# Altium PCB PCB_my-ic_2025-09-05.pcbdoc
Units mm, origin at the board's own origin, x right, y up, seen from the top; angles counter-clockwise.
Board outline 82.87 x 43.85 mm, 2 copper layers (Top Layer, Bottom Layer); 40 components, 28 nets, 131 pads, 60 vias.
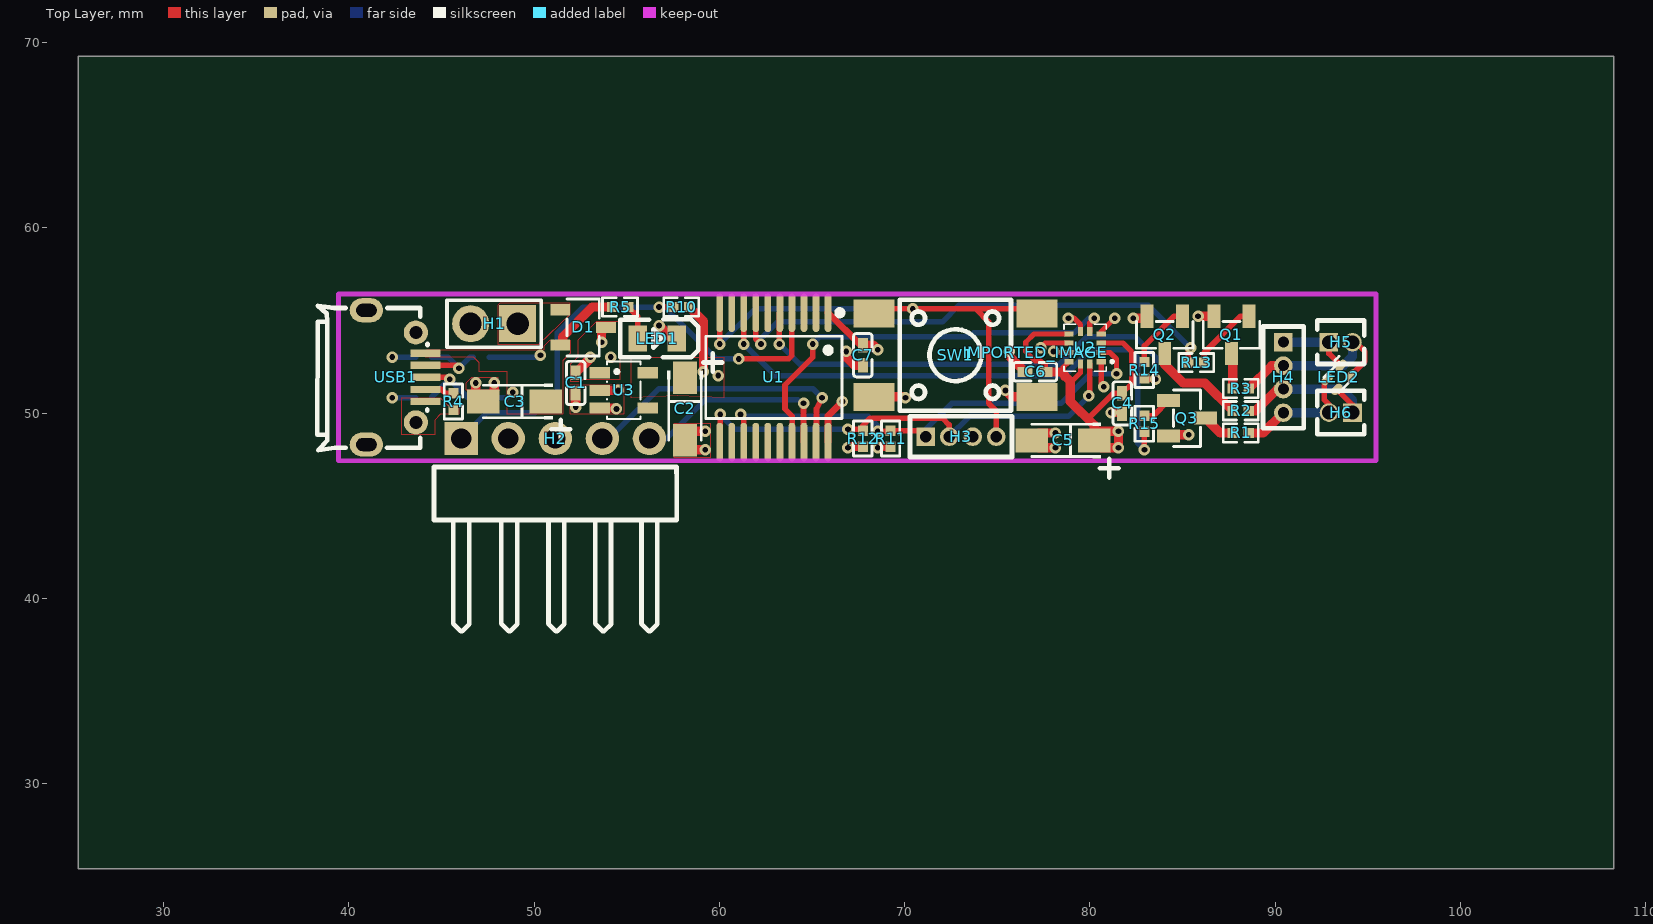
[diagram p0: Top Layer view]
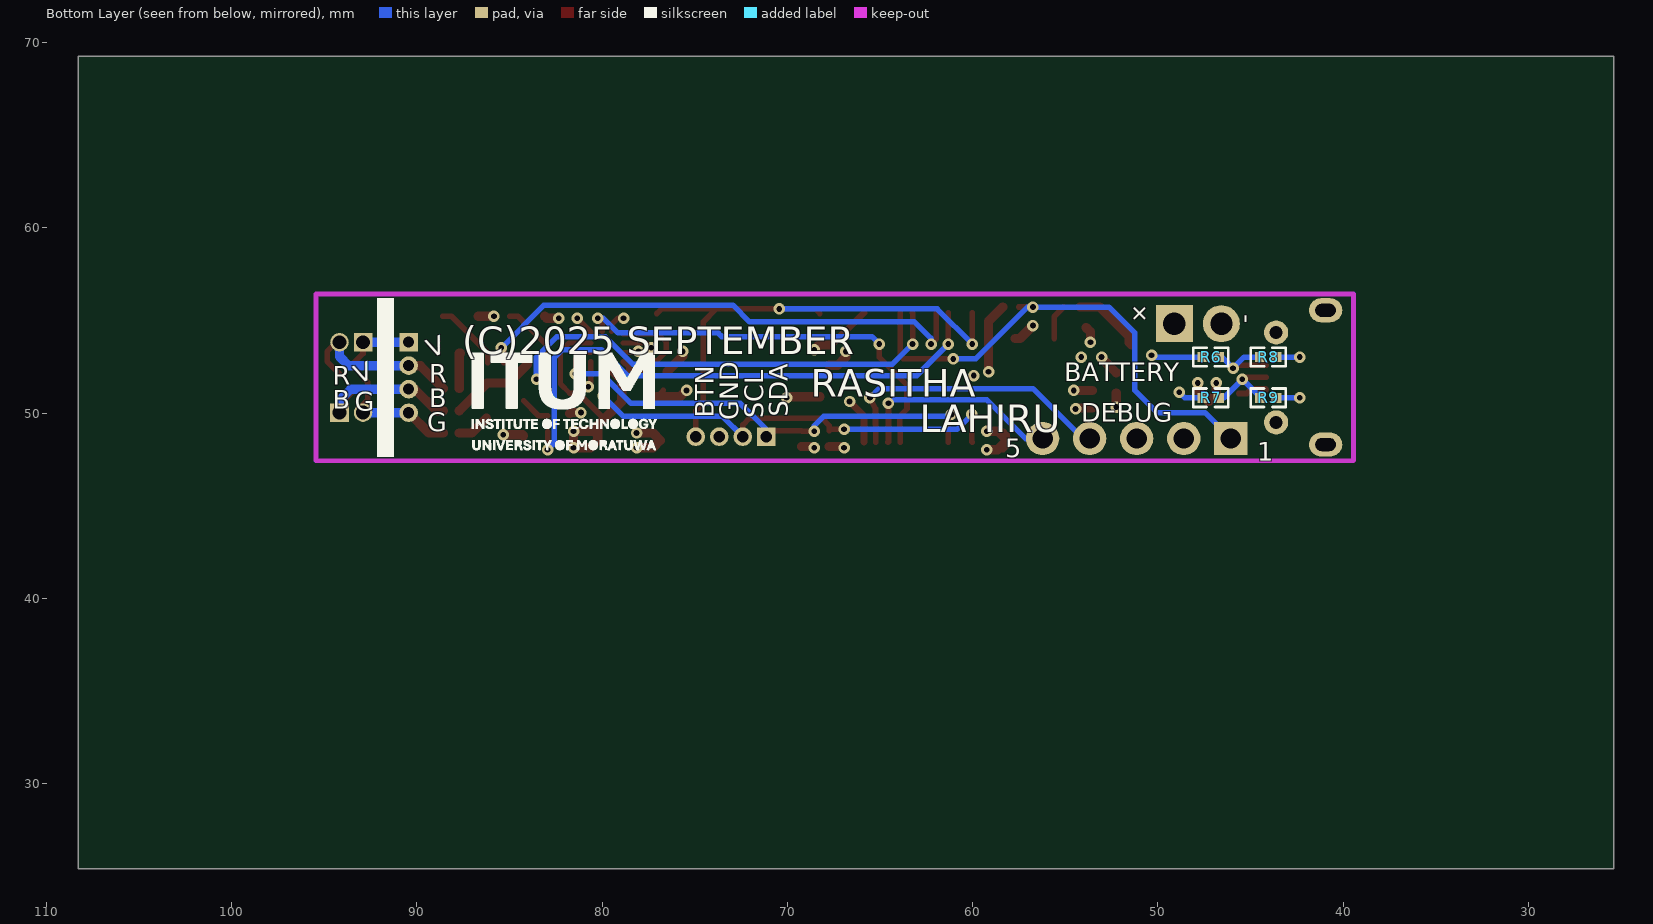
[diagram p1: Bottom Layer view, seen from below]

## Layer stack, top to bottom
Top Layer: signal copper (thickness not stored)
Dielectric: dielectric 0.32, FR-4, Dk 4.8
Bottom Layer: signal copper (thickness not stored)

## Board outline
108.268,25.4 25.4,25.4 25.4,69.254 108.268,69.254

## Components (designator, comment, footprint, x,y, rotation, side; value= is the part's Value field where it differs from the comment)
C1 "1uF" C0402 52.241,51.627 r90 top
C2 "10uF" CAP-SMD_L3.2-W1.6-RD-C7171 58.141,50.227 r270 top
C3 "10uF" CAP-SMD_L3.2-W1.6-RD-C7171 48.941,50.627 r180 top
C4 "100nF" C0402 81.741,50.527 r90 top
C5 "10uF" CAP-SMD_L3.2-W1.6-RD-C7171 78.541,48.527 r180 top
C6 "100nF" C0402 77.041,52.227 r0 top
C7 "100nF" C0402 67.741,53.127 r90 top
D1 "BAT54CLT1G" SOT-23-3_L2.9-W1.6-P1.90-LS2.8-BR 52.641,54.627 r180 top
H1 "TSW-102-07-G-S" HDR-TH_2P-P2.54-V-M 47.841,54.827 r180 top
H2 "PZ254R-11-05P" HDR-TH_5P-P2.54-H-M-W10.4 51.141,48.627 r0 top
H3 "PM127V-11-04P-H34" HDR-TH_4P-P1.27-V-F 73.041,48.727 r0 top
H4 "PM127V-11-04P-H34" HDR-TH_4P-P1.27-V-F 90.441,51.927 r270 top
H5 "1.27MM/1*2P" HDR-TH_2P-P1.27-V-M 93.541,53.827 r0 top
H6 "1.27MM/1*2P" HDR-TH_2P-P1.27-V-M 93.541,50.027 r180 top
IMPORTED_IMAGE "IMPORTED_IMAGE" IMPORTED_IMAGE 77.041,53.255 r0 top
LED1 "0805G (Green)" LED0805-R-RD 56.641,54.027 r180 top
LED2 "SMLP34RGB2W3A" LED-ARRAY-SMD_4P-L1.00-W1.00-TL 93.441,51.927 r45 top
Q1 "2N7002" SOT-23-3_L2.9-W1.3-P1.90-LS2.4-BR 87.641,54.227 r90 top
Q2 "2N7002" SOT-23-3_L2.9-W1.3-P1.90-LS2.4-BR 84.041,54.227 r90 top
Q3 "2N7002" SOT-23-3_L2.9-W1.3-P1.90-LS2.4-BR 85.241,49.727 r180 top
R1 "560Ω" R0402#1 88.141,48.927 r0 top
R2 "560Ω" R0402#1 88.141,50.127 r0 top
R3 "560Ω" R0402#1 88.141,51.327 r0 top
R4 "0Ω" R0402#1 45.641,50.627 r270 top
R5 "10kΩ" R0402#1 54.641,55.727 r180 top
R6 "5.1kΩ" R0402#2 47.141,53.027 r180 bottom
R7 "5.1kΩ" R0402#2 47.141,50.827 r180 bottom
R8 "10kΩ" R0402#2 44.041,53.027 r180 bottom
R9 "10kΩ" R0402#2 44.041,50.827 r180 bottom
R10 "10kΩ" R0402#1 57.941,55.727 r0 top
R11 "10kΩ" R0402#1 69.241,48.627 r270 top
R12 "10kΩ" R0402#1 67.741,48.627 r270 top
R13 "0Ω" R0402#1 85.741,52.727 r0 top
R14 "0Ω" R0402#1 82.941,52.327 r90 top
R15 "0Ω" R0402#1 82.941,49.427 r90 top
SW1 "K2-1102SP-C3SC-04" SW-SMD_4P-L6.0-W6.0-P4.50-LS9.0 72.741,53.127 r0 top
U1 "PIC16F1829-I/SS" SSOP-20_L7.2-W5.3-P0.65-LS7.8-BL 62.941,51.927 r180 top
U2 "KXTJ3-1057" LGA-12_L2.0-W2.0-P0.50-BL 79.741,53.527 r90 top
U3 "TPS76933DBVR(PB-FREE)" SOT-23-5_L3.0-W1.7-P0.95-LS2.8-BR 54.841,51.227 r180 top
USB1 "MICROXNJ" MICRO-USB-SMD_MICROXNJ 42.541,51.927 r270 top

## Footprints (in the part's own frame and the unit in brackets; to place one, negate y for a bottom-side part, rotate by r counter-clockwise, add the part's x,y. Pads: shape width x height; smd on the part's side, far side on the other; paste and mask are expansions set on the pad)
C0402 [mm]
  rect 0.79x0.54 smd paste-100 mask+0.051: 1(-0.545,0) 2(0.545,0)
  silkscreen extent -1.17,-0.5 1.17,0.5
CAP-SMD_L3.2-W1.6-RD-C7171 [mm]
  rect 1.758x1.296 smd paste+0 mask+0.051: 1(-1.686,0) 2(1.686,0)
  silkscreen extent -3,-0.95 1.68,2
HDR-TH_2P-P1.27-V-M [mm]
  rect 1x1 hole 0.75 paste+0 mask+0.051: 1(-0.635,0)
  round 1 hole 0.75 paste+0 mask+0.051: 2(0.635,0)
  silkscreen extent -1.27,-1.18 1.27,1.18
HDR-TH_2P-P2.54-V-M [mm]
  rect 2x2 hole 1.2 paste+0 mask+0.051: 1(-1.27,0)
  round 2 hole 1.2 paste+0 mask+0.051: 2(1.27,0)
  silkscreen extent -2.54,-1.27 2.54,1.27
HDR-TH_4P-P1.27-V-F [mm]
  rect 1x1 hole 0.6 paste+0 mask+0.051: 1(-1.905,0)
  round 1 hole 0.6 paste+0 mask+0.051: 2(-0.635,0) 3(0.635,0) 4(1.905,0)
  silkscreen extent -2.75,-1.1 2.75,1.1
HDR-TH_5P-P2.54-H-M-W10.4 [mm]
  rect 1.8x1.8 hole 1.1 paste+0 mask+0.051: 1(-5.08,0)
  round 1.8 hole 1.1 paste+0 mask+0.051: 2(-2.54,0) 3(0,0) 4(2.54,0) 5(5.08,0)
  silkscreen extent -6.55,-10.4 6.55,-1.54
IMPORTED_IMAGE [mm]
LED0805-R-RD [mm]
  rect 1x1.4 smd paste+0 mask+0.051: 1(1.05,0) 2(-1.05,0)
  silkscreen extent -2.22,-1.04 1.99,1.01
LED-ARRAY-SMD_4P-L1.00-W1.00-TL [mm]
  oval 0.715x0.42 smd paste+0 mask+0.051: 1(0.533,0.375) 2(0.533,-0.375) 3(-0.532,-0.375) 4(-0.532,0.375)
  silkscreen extent -0.58,-0.58 0.8,0.8
LGA-12_L2.0-W2.0-P0.50-BL [mm]
  rect 0.28x0.5 smd paste+0 mask+0.051: 1(-0.75,-0.875) 2(-0.25,-0.875) 3(0.25,-0.875) 4(0.75,-0.875) 7(0.75,0.875) 8(0.25,0.875) 9(-0.25,0.875) 10(-0.75,0.875)
  rect 0.5x0.28 smd paste+0 mask+0.051: 5(0.875,-0.25) 6(0.875,0.25) 11(-0.875,0.25) 12(-0.875,-0.25)
  silkscreen extent -1.27,-1.53 1.27,1.14
MICRO-USB-SMD_MICROXNJ [mm]
  rect 0.4x1.6 smd paste-100 mask+0.051: 1(-1.3,1.596) 2(-0.65,1.596) 3(0,1.596) 4(0.65,1.596) 5(1.3,1.596)
  round 1.3 hole 0.7 paste+0 mask+0.051: 6(2.425,1.074) 9(-2.425,1.074)
  oval 1.3x1.8 hole 0.7 slot 1.1 at 90 deg paste+0 mask+0.051: 7(3.625,-1.596) 8(-3.625,-1.596)
  silkscreen extent -3.87,-4.24 3.93,1.71
R0402#1 [mm]
  rect 0.566x0.54 smd paste-100 mask+0.051: 1(-0.433,0) 2(0.433,0)
  silkscreen extent -0.94,-0.5 0.94,0.5
R0402#2 [mm]
  rect 0.566x0.54 smd paste-100 mask+0.051: 1(0.433,0) 2(-0.433,0)
  silkscreen extent -0.94,-0.5 0.94,0.5
SOT-23-3_L2.9-W1.3-P1.90-LS2.4-BR [mm]
  rect 1.25x0.7 smd paste+0 mask+0.051: 1(1,-0.95) 2(1,0.95) 3(-1,0)
  silkscreen extent -0.73,-1.53 0.73,1.53
SOT-23-3_L2.9-W1.6-P1.90-LS2.8-BR [mm]
  rect 1.07x0.6 smd paste+0 mask+0.051: 1(1.235,-0.95) 2(1.235,0.95) 3(-1.235,0)
  silkscreen extent -0.88,-1.54 0.88,1.54
SOT-23-5_L3.0-W1.7-P0.95-LS2.8-BR [mm]
  rect 1.1x0.6 smd paste+0 mask+0.051: 1(1.3,-0.95) 2(1.3,0) 3(1.3,0.95) 4(-1.3,0.95) 5(-1.3,-0.95)
  silkscreen extent -0.9,-1.55 0.9,1.55
SSOP-20_L7.2-W5.3-P0.65-LS7.8-BL [mm]
  oval 0.364x2.082 smd paste+0 mask+0.051: 1(-2.925,-3.491) 2(-2.275,-3.491) 3(-1.625,-3.491) 4(-0.975,-3.491) 5(-0.325,-3.491) 6(0.325,-3.491) 7(0.975,-3.491) 8(1.625,-3.491) 9(2.275,-3.491) 10(2.925,-3.491) 11(2.925,3.491) 12(2.275,3.491) 13(1.625,3.491) 14(0.975,3.491) 15(0.325,3.491) 16(-0.325,3.491) 17(-0.975,3.491) 18(-1.625,3.491) 19(-2.275,3.491) 20(-2.925,3.491)
  silkscreen extent -3.71,-3.64 3.68,2.22
SW-SMD_4P-L6.0-W6.0-P4.50-LS9.0 [mm]
  rect 2.2x1.5 smd paste+0 mask+0.051: 1(-4.4,2.25) 2(-4.4,-2.25) 3(4.4,2.25) 4(4.4,-2.25)
  silkscreen extent -3,-3 3,3

## Via types
v1: diameter 0.62, hole 0.31, Top Layer to Bottom Layer, tented both sides, 60 vias

## Nets (pads, with @x,y where several pads share a name; then routed paths per layer and width w, separated by ;. In a path a pad name is that pad's centre, name@x,y a point inside that pad or via, vN(x,y) a via of type N, cw(c..) or ccw(c..) an arc to the next point about the centre after c; other vN are vias at no path point)
3V3: C2.1 C4.2 C5.1 C6.2 C7.2 H2.2 R10.2 R11.2 R12.2 U1.1 U2.3 U2.7 U2.10 U2.11 U3.5 | length 34.5
  Top Layer w0.28: C6.2@77.587,52.226 77.587,52.581 77.34,52.828 77.041,52.828 76.54,53.328 76.54,53.826 76.99,54.278 U2.7 ; 78.562,51.906 78.562,52.473 U2.10 ; 78.941,51.527 78.941,51.626 79.492,52.178 U2.11 ; U2.3 81.79,53.778 82.24,53.328 82.24,51.573 C4.2@81.742,51.073
  Top Layer w0.3: v1(66.941,48.127) 67.674,48.127 R12.2 ; C7.2@67.742,53.671 68.295,53.671 v1(68.541,53.427) ; v1(68.541,48.127) 69.174,48.127 R11.2 ; 79.885,49.683 81.274,51.072 C4.2
  Top Layer w0.364: U1.1@65.866,55.418 67.612,53.672 C7.2
  Top Layer w0.5: R10.2 59.141,54.96 v1(59.141,52.227) ; v1(66.941,48.127) 67.008,48.194 R12.2 ; C7.2 68.296,53.672 v1(68.541,53.427) ; v1(68.541,48.127) 68.608,48.194 R11.2 ; C6.2@77.587,52.226 78.44,52.226 78.941,51.728 78.941,50.628 80.228,49.34 C5.1 ; v1(81.541,48.127) v1(81.541,49.027) ; v1@81.542,48.126 80.627,48.126 C5.1 ; v1(81.541,49.027) 80.442,49.028 80.228,48.812 C5.1
  other v1: 59.941,52.027
+5V_USB: C3.1 D1.2 R5.2 R6.2 R7.2 USB1.1 | length 8
  Top Layer w0.5: D1.2 51.541,53.812 51.541,54.127 53.141,55.727 R5.2
  Bottom Layer w0.3: R7.2 48.541,50.827 v1(48.841,51.127) ; R6.2 50.241,53.027 v1(50.341,53.127)
+VBAT: D1.1 H1.1
+VIN: C1.2 D1.3 H4.1 H5.1 LED2.1 U3.1 | length 8.2
  Top Layer w0.3: C1.2 53.041,52.973 v1(53.041,53.027) ; v1(53.641,53.827) 53.641,54.392 D1.3 ; H5.1 92.906,53.215 LED2.1
  Top Layer w0.5: C1.2 53.041,52.973 v1(53.041,53.027) ; v1(53.641,53.827) 53.641,54.392 D1.3
  Bottom Layer w0.5: H4.1@90.442,53.831 H5.1@92.906,53.826
  other v1: 54.141,53.027
BUTTON: H3.4 SW1.1 SW1.3 U1.10 | length 29.4
  Top Layer w0.3: v1(60.016,53.727) U1.10 ; SW1.1@68.241,55.377 68.491,55.627 v1(70.441,55.627) 76.791,55.627 SW1.3@77.041,55.377 ; 73.678,55.627 73.84,55.627 74.541,54.926 74.541,50.527 74.945,50.123 H3.4@74.945,48.726
  Bottom Layer w0.3: v1(60.016,53.727) 61.916,55.627 v1(70.441,55.627)
GND: C1.1 C2.2 C3.2 C4.1 C5.2 C6.1 C7.1 H1.2 H2.3 H3.3 LED1.2 Q1.2 Q2.2 Q3.2 R4.2 R8.1 R9.1 SW1.2 SW1.4 U1.20 U2.1 U2.4 U2.6 U2.8 U2.9 U3.2 U3.3 USB1.5 USB1.6 USB1.7 USB1.8 USB1.9 | length 43.2
  Top Layer w0.28: v1(77.341,53.527) 77.591,53.777 U2.8 ; v1(78.041,53.327) 78.09,53.277 U2.9 ; v1@78.842,55.126 79.141,55.126 79.492,54.776 U2.6 ; U2.1 80.616,51.552 v1(80.741,51.427) ; U2.4 80.617,54.403 v1@81.341,55.126
  Top Layer w0.3: v1(46.841,51.627) 46.841,51.041 C3.2 ; v1(52.241,50.327) C1.1 ; U3.3 54.391,50.277 v1(54.441,50.227) ; U3.2 v1(54.541,51.227) ; v1(56.741,54.727) 57.441,54.027 LED1.2 ; v1(59.241,48.027) 58.341,48.027 58.141,48.228 58.141,48.54 58.141,48.827 58.341,49.028 v1(59.241,49.027) ; SW1.2@68.241,50.877 68.291,50.827 v1(70.041,50.827) ; SW1.4@76.691,51.227 SW1.4@77.041,50.877
  Top Layer w0.364: U1.20@65.866,48.436 65.866,49.852 v1(66.641,50.627)
  Top Layer w0.5: v1(46.841,51.627) 46.841,51.041 C3.2 47.841,51.213 v1(47.841,51.627) ; v1(52.241,50.327) C1.1 ; U3.3 54.391,50.277 v1(54.441,50.227) ; U3.2 v1(54.541,51.227) ; v1(56.741,54.727) 57.441,54.027 LED1.2 ; v1(59.241,48.027) 58.655,48.027 58.141,48.541 58.627,49.027 v1(59.241,49.027) ; v1(66.841,53.327) 66.84,53.026 67.287,52.581 C7.1@67.742,52.581 ; SW1.2@68.241,50.877 69.991,50.877 v1(70.041,50.827) ; v1(75.441,51.227) 75.791,50.877 SW1.4@77.041,50.877 ; v1(75.641,53.327) 75.641,53.082 C6.1@76.496,52.227 ; v1@78.14,48.126 77.254,48.126 C5.2 77.254,48.926 v1@78.14,48.926 ; v1(81.141,50.027) 81.696,50.027 C4.1 ; v1(82.341,55.127) 82.991,55.127 Q2.2 ; Q3.2 84.291,48.827 v1(85.341,48.827) ; v1(85.841,55.227) Q1.2
  Bottom Layer w0.3: v1(42.341,50.827) R9.1 ; v1(42.341,53.027) R8.1
  other v1: 78.141,48.127 78.141,48.927 78.841,55.127 81.341,55.127
I2C1_SCL: H3.2 R12.1 U1.11 U2.12 | length 25.6
  Top Layer w0.28: v1(79.941,50.927) 79.991,50.977 U2.12@79.991,52.652
  Top Layer w0.3: U1.11 60.041,48.461 v1(60.041,49.927) ; v1(66.941,49.127) 67.674,49.127 R12.1 ; R12.1 67.742,49.328 68.141,49.726 72.042,49.726 72.405,49.363 H3.2@72.405,48.726
  Bottom Layer w0.3: v1(60.041,49.927) 60.841,49.127 v1(66.941,49.127) ; H3.2@72.405,48.726 73.506,49.827 78.841,49.827 v1(79.941,50.927)
I2C1_SDA: H3.1 R11.1 U1.13 U2.2 | length 26
  Top Layer w0.28: U2.2 81.092,53.277 81.44,52.927 v1(81.441,52.127)
  Top Layer w0.3: v1(61.141,49.927) 61.316,49.752 U1.13 ; v1(68.541,49.027) 69.208,49.027 R11.1 70.803,49.06 H3.1
  Bottom Layer w0.3: v1(61.141,49.927) 61.241,49.827 68.041,49.827 68.541,49.327 v1(68.541,49.027) ; H3.1 71.136,49.122 72.541,50.527 78.441,50.527 80.041,52.127 v1(81.441,52.127)
ICSPCLK: H2.5 U1.18 | length 11.4
  Top Layer w0.3: v1(64.541,50.527) 64.541,48.461 U1.18
  Bottom Layer w0.3: H2.5 57.14,48.627 59.24,50.727 64.241,50.727 v1@64.541,50.527
ICSPDAT: H2.4 U1.19 | length 15.6
  Top Layer w0.3: U1.19@65.216,48.434 65.241,50.227 v1(65.541,50.827)
  Bottom Layer w0.3: H2.4 54.041,48.627 56.741,51.327 59.957,51.327 65.041,51.327 v1(65.541,50.827)
INT: U1.17 U2.5 | length 22.7
  Top Layer w0.28: U2.5@79.991,54.402 79.991,54.877 v1(80.241,55.127)
  Top Layer w0.3: U1.17 63.942,49.828 63.541,50.229 63.541,51.525 65.042,53.026 v1(65.041,53.727)
  Bottom Layer w0.3: v1(65.041,53.727) 65.44,54.126 73.541,54.126 73.741,54.326 79.141,54.326 79.941,55.126 v1@80.241,55.126
LED1_1: LED1.1 R5.1 | length 1.9
  Top Layer w0.3: R5.1 55.591,55.21 LED1.1
LED_B: Q2.1 R14.2 | length 3.6
  Top Layer w0.3: R14.2 82.941,53.627 84.541,55.227 Q2.1
LED_B_CON: H4.3 H6.1 LED2.3 R2.2 | length 8.6
  Top Layer w0.3: LED2.3 94.176,50.439 H6.1
  Top Layer w0.5: R2.2 88.941,50.128 90.106,51.291 H4.3@90.442,51.291
  Bottom Layer w0.5: H4.3@90.442,51.291 93.576,51.291 94.176,50.692 H6.1@94.176,50.026
LED_B_R: R14.1 U1.5 | length 25.4
  Top Layer w0.3: v1(63.241,53.727) 63.241,55.393 U1.5 ; R14.1 83.008,51.827 v1(83.541,51.827)
  Bottom Layer w0.3: v1(63.241,53.727) 64.341,52.627 78.341,52.627 79.841,54.127 82.441,54.127 83.541,53.027 v1(83.541,51.827)
LED_G: Q3.1 R15.2 | length 1.6
  Top Layer w0.3: R15.2 83.424,49.86 Q3.1
LED_G_CON: H4.4 H6.2 LED2.4 R1.2 | length 6.7
  Top Layer w0.3: LED2.4 92.641,51.657 92.641,50.727 92.906,50.462 H6.2
  Top Layer w0.5: R1.2 89.346,48.927 H4.4
  Bottom Layer w0.5: H4.4@90.442,50.021 H6.2@92.906,50.026
LED_G_R: R15.1 U1.8 | length 30.5
  Top Layer w0.3: v1(61.316,53.727) U1.8 ; v1(82.941,48.027) R15.1
  Bottom Layer w0.3: v1(61.316,53.727) 63.015,52.028 78.641,52.028 80.04,53.427 82.141,53.427 82.585,52.983 ; 82.585,52.983 82.585,48.383 v1(82.941,48.027)
LED_R: Q1.1 R13.2 | length 3.8
  Top Layer w0.3: R13.2 86.174,53.26 88.141,55.227 Q1.1
LED_R_CON: H4.2 H5.2 LED2.2 R3.2 | length 9.6
  Top Layer w0.3: LED2.2 94.841,52.797 94.841,53.327 94.341,53.827 H5.2
  Top Layer w0.5: R3.2 89.809,52.561 H4.2@90.442,52.561
  Bottom Layer w0.5: H4.2@90.442,52.561 93.675,52.561 94.176,53.061 H5.2@94.176,53.826
LED_R_R: R13.1 U1.7 | length 27.9
  Top Layer w0.3: U1.7 61.966,54.002 v1(62.241,53.727) ; R13.1@85.308,52.726 85.308,53.394 v1@85.44,53.526
  Bottom Layer w0.3: v1(62.241,53.727) 62.24,54.027 63.142,54.926 72.042,54.926 72.941,55.828 83.142,55.828 v1@85.44,53.526
  other v1: 85.441,53.527
MCLR#/VPP: H2.1 R10.1 U1.4 | length 26.9
  Top Layer w0.3: v1(56.741,55.727) R10.1 ; v1(61.041,52.927) 63.741,52.927 63.916,53.102 U1.4
  Bottom Layer w0.3: H2.1 47.46,50.026 50.04,50.026 51.242,51.228 51.242,54.326 52.641,55.726 56.741,55.726 57.042,55.726 59.841,52.927 v1(61.041,52.927)
R1_1: Q3.3 R1.1 | length 1.8
  Top Layer w0.5: Q3.3 87.041,48.927 R1.1
R2_1: Q2.3 R2.1 | length 5.3
  Top Layer w0.5: Q2.3@84.041,53.227 84.041,52.627 85.042,51.626 86.208,51.626 R2.1
R3_1: Q1.3 R3.1 | length 2
  Top Layer w0.5: Q1.3@87.64,53.227 87.709,53.227 R3.1
USB1_2: R6.1 R8.2 USB1.2 | length 4.6
  Top Layer w0.3: USB1.2 45.791,52.577 v1(45.941,52.427)
  Bottom Layer w0.3: R8.2 45.341,53.027 v1(45.941,52.427) 46.541,53.027 R6.1
USB1_3: R7.1 R9.2 USB1.3 | length 4.5
  Top Layer w0.3: USB1.3@44.138,51.926 45.441,51.926 v1(45.441,51.827)
  Bottom Layer w0.3: R9.2 44.474,50.86 v1(45.441,51.827) 46.441,50.827 R7.1
USB1_4: R4.1 USB1.4 | length 1.6
  Top Layer w0.3: USB1.4@44.138,51.276 44.188,51.327 44.94,51.327 45.207,51.06 R4.1
pads on no net: U1.2 U1.3 U1.6 U1.9 U1.12 U1.14 U1.15 U1.16 U3.4
copper on no net: | length 0

## Polygon pours and split planes (outlines as drawn)
GND on Mid-Layer 2 (solid): 39.641,47.627 91.041,47.627 91.041,56.227 39.641,56.227 39.641,47.627
+VIN on Mid-Layer 1 (solid): 82.341,47.827 82.341,51.427 72.741,51.427 70.241,53.927 68.141,53.927 66.441,53.927 65.891,51.627 61.041,51.627 59.841,52.827 58.241,52.827 57.941,52.627 52.641,52.627 52.641,56.027 90.941,56.027 90.941,53.327 91.041,47.827
3V3 on Mid-Layer 1 (solid): 39.991,47.977 39.991,55.977 91.041,55.927 91.041,47.827 39.991,47.977
3V3 on Top Layer (solid): 60.241,53.027 60.241,50.827 57.741,50.927 55.241,50.827 55.241,53.027 60.241,53.027
+VIN on Top Layer (solid): 54.641,51.827 54.641,54.927 53.341,54.927 52.341,53.927 52.341,53.027 51.941,52.627 51.941,51.727 52.541,51.727 52.641,51.827 53.241,51.827
GND on Top Layer (solid): 51.941,51.527 54.841,51.527 54.841,49.927 51.941,49.927 51.941,51.527
+VBAT on Top Layer (solid): 51.941,55.927 48.141,55.927 48.041,55.827 48.041,53.727 50.141,53.727 50.241,53.727 51.941,55.327 51.941,55.927
+5V_USB on Top Layer (solid): 44.241,53.427 50.541,53.427 50.541,53.627 50.841,53.927 51.941,53.927 51.941,53.327 51.941,53.227 51.541,52.827 51.541,49.927 48.541,49.927 48.541,52.227 47.041,52.227 47.041,52.727 46.741,53.027 44.141,53.027
GND on Top Layer (solid): 44.841,50.827 44.941,50.827 45.341,50.427 45.941,50.427 45.941,49.927 45.141,49.927 44.941,49.927 44.641,49.627 44.641,48.827 42.841,48.827 42.841,49.227 42.841,50.327 42.841,50.827 43.341,50.827
GND on Top Layer (solid): 46.341,51.227 46.341,51.627 46.641,51.927 48.041,51.927 48.041,51.327 48.141,51.227 47.241,51.227
GND on Top Layer (solid): 59.541,49.427 57.541,49.427 57.541,47.627 59.541,47.627

## Silkscreen, mask and mechanical layers (free items; w line width, h text height)
Bottom Overlay:
  rectangle: 91.241,47.627 92.141,56.227
  text "-" at 45.641,55.327 h1 r90
  text "+" at 51.087,54.673 h1 r315
  text "(C)2025 SEPTEMBER" at 87.541,53.177 h1.5
  text "V" at 89.262,52.96 h1 r339
  text "BATTERY" at 55.041,51.727 h1
  text "R" at 89.341,51.627 h1
  text "V" at 93.162,51.56 h1 r339
  text "R" at 94.541,51.527 h1
  text "RASITHA" at 68.741,50.877 h1.5
  text "B" at 89.341,50.327 h1
  text "B" at 94.541,50.227 h1
  text "G" at 93.341,50.127 h1
  text "SDA" at 69.974,49.792 h1 r270
  text "SCL" at 71.308,49.728 h1 r270
  text "BTN" at 73.974,49.737 h1 r270
  text "GND" at 72.641,49.627 h1 r270
  text "DEBUG" at 54.141,49.527 h1
  text "G" at 89.441,49.027 h1
  text "LAHIRU" at 62.841,48.977 h1.5
  text "5" at 58.241,47.627 h1
  text "1" at 44.641,47.427 h1